# Altium PCB Sensor.PcbDoc
Units mil, origin at the board's own origin, x right, y up, seen from the top; angles counter-clockwise.
Board outline 6000 x 4000 mil, 2 copper layers (Top Layer, Bottom Layer); 24 components, 21 nets, 89 pads, 20 vias.
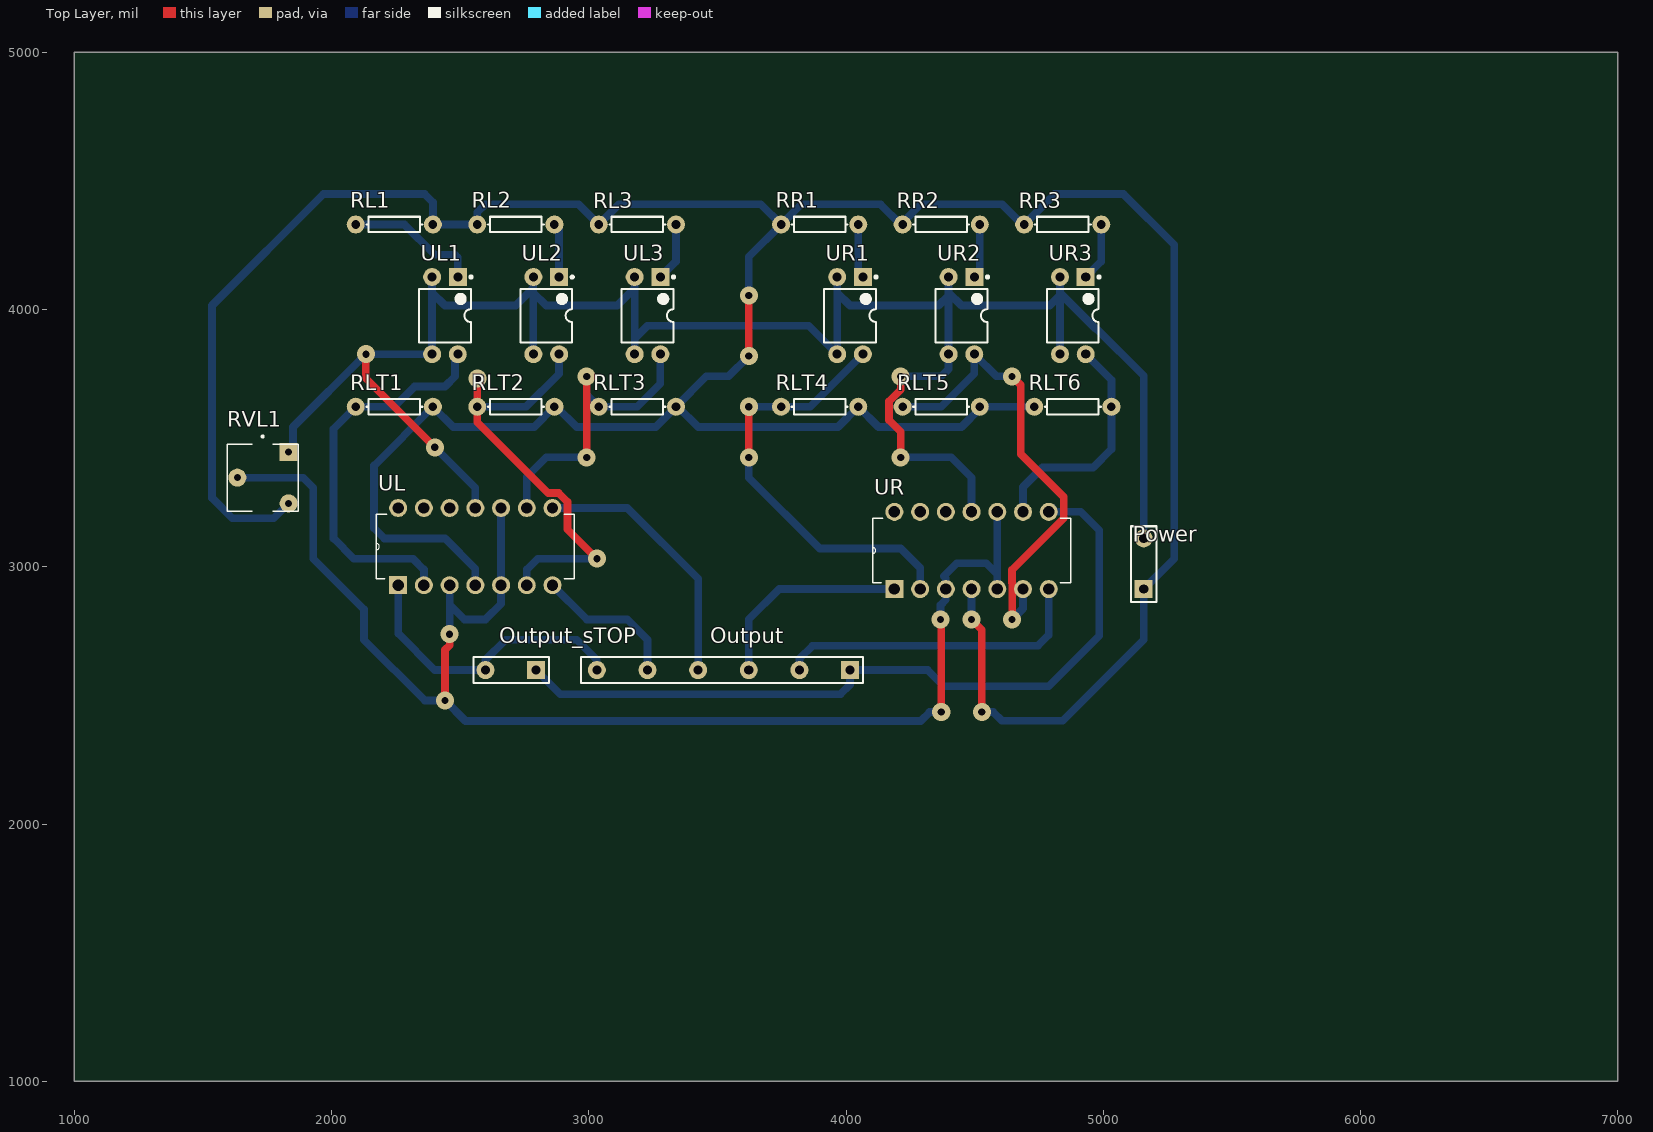
[diagram p0: Top Layer view]
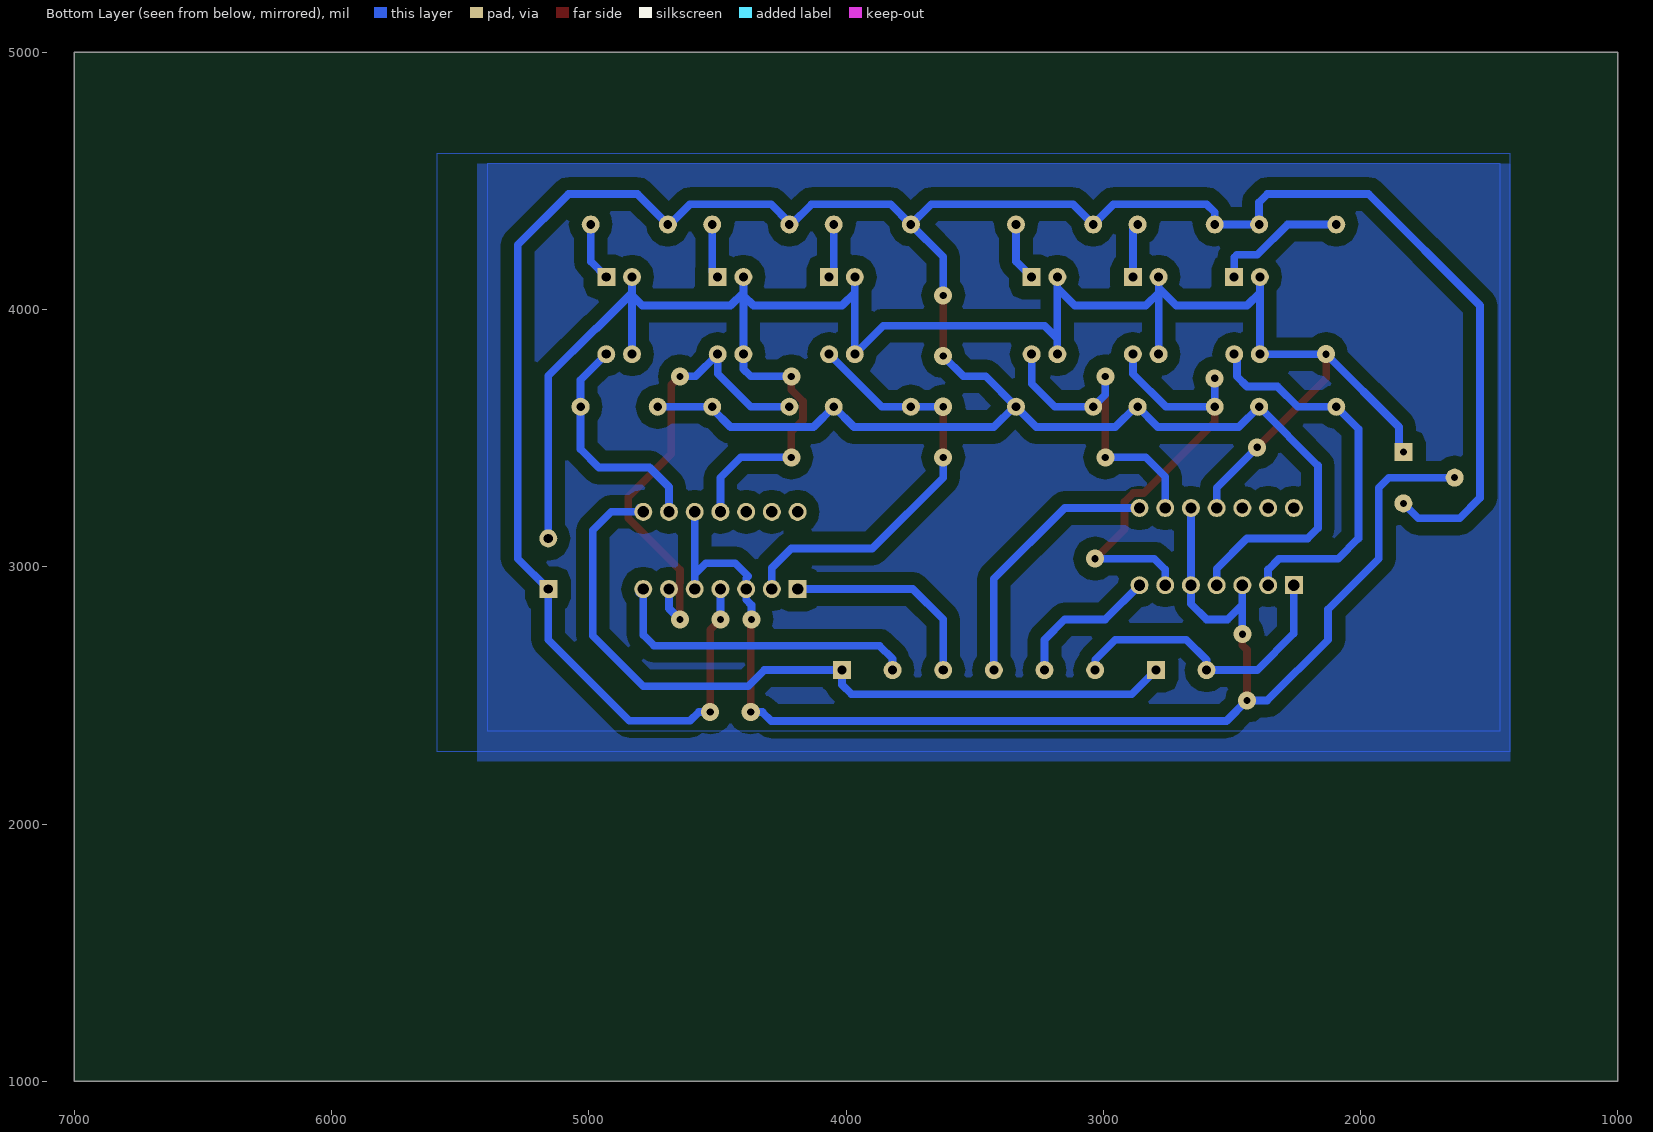
[diagram p1: Bottom Layer view, seen from below]

## Layer stack, top to bottom
Top Solder: solder mask 0.4, Solder Resist, Dk 3.5
Top Layer: signal copper 1.4
Dielectric 1: dielectric 12.6, FR-4, Dk 4.8
Bottom Layer: signal copper 1.4
Bottom Solder: solder mask 0.4, Solder Resist, Dk 3.5

## Board outline
1000,1000 7000,1000 7000,5000 1000,5000

## Design rules (kind name [scope] priority, off if disabled: settings)
Clearance [All] p1: gap=50 ignorepadtopadclearanceinfootprint=TRUE except(0: Arc-Hole Track-Hole SMDPad-Hole THPad-Hole Via-Hole Fill-Hole Poly-Hole Region-Hole Text-Hole)
PolygonConnect [All] p1: connectstyle=Relief reliefconductorwidth=10 reliefentries=4 polygonreliefangle="90 Angle" airgapwidth=10
RoomDefinition Sensor_Panel_6 [InComponentClass('Sensor_Panel_6')] p1: confinementstyle=ConfineIn formatcopy=TRUE lockcomponents=FALSE outline 7047.25,1102.36 7755.91,1102.36 7755.91,1496.06 7047.25,1496.06
RoomDefinition "AT long bus (13.3 x 4.2 inches)" [InComponentClass('AT long bus (13.3 x 4.2 inches)')] p2: confinementstyle=ConfineIn formatcopy=TRUE lockcomponents=FALSE outline 0,0 2000,0 2000,1000 0,1000
RoutingVias [All] p1: holewidth=28 width=50 viastyle="Through Hole" minholewidth=28 minwidth=50 maxholewidth=28 maxwidth=50
SolderMaskExpansion [All] p1: expansion=4
UnRoutedNet [All] p1: checkbadconnections=TRUE
Width [All] p1: maxlimit=30 minlimit=10 preferedwidth=30 minimp=50.000000 maximp=50.000000 favimp=50.000000
29 further rules are at their usual default settings.

## Classes and differential pairs
component class "AT long bus (13.3 x 4.2 inches)": P?

## Components (designator, comment, footprint, x,y, rotation, side; value= is the part's Value field where it differs from the comment)
Output "Header 6" HDR1X6 4015.75,2598.43 r180 top
Output_sTOP "Header 2" HDR1X2 2795.28,2598.43 r180 top
Power "Header 2" HDR1X2 5157.48,2913.39 r90 top
RL1 "Res1" AXIAL-0.3 2244.09,4330.71 r0 top value=1K
RL2 "Res1" AXIAL-0.3 2716.54,4330.71 r180 top value=1K
RL3 "Res1" AXIAL-0.3 3188.98,4330.71 r180 top value=1K
RLT1 "Res1" AXIAL-0.3 2244.09,3622.05 r180 top value=1K
RLT2 "Res1" AXIAL-0.3 2716.54,3622.05 r180 top value=1K
RLT3 "Res1" AXIAL-0.3 3188.98,3622.05 r180 top value=1K
RLT4 "Res1" AXIAL-0.3 3897.64,3622.05 r180 top value=1K
RLT5 "Res1" AXIAL-0.3 4370.08,3622.05 r180 top value=1K
RLT6 "Res1" AXIAL-0.3 4881.89,3622.05 r0 top value=1K
RR1 "Res1" AXIAL-0.3 3897.64,4330.71 r180 top value=1K
RR2 "Res1" AXIAL-0.3 4370.08,4330.71 r180 top value=1K
RR3 "Res1" AXIAL-0.3 4842.52,4330.71 r180 top value=1K
RVL1 "3362R-1-222" *TRIM_3362R-1-222 1732.28,3346.46 r270 top
UL "LM324N" *DIP254P762X508-14 2859.06,3228.35 r90 top
UL1 "Optoisolator1" DIP-4 2440.94,3976.38 r270 top
UL2 "Optoisolator1" DIP-4 2834.65,3976.38 r270 top
UL3 "Optoisolator1" DIP-4 3228.35,3976.38 r270 top
UR "LM324N" *DIP254P762X508-14 4788.19,3213.39 r90 top
UR1 "Optoisolator1" DIP-4 4015.75,3976.38 r270 top
UR2 "Optoisolator1" DIP-4 4448.82,3976.38 r270 top
UR3 "Optoisolator1" DIP-4 4881.89,3976.38 r270 top

## Footprints (in the part's own frame and the unit in brackets; to place one, negate y for a bottom-side part, rotate by r counter-clockwise, add the part's x,y. Pads: shape width x height; smd on the part's side, far side on the other; paste and mask are expansions set on the pad)
*DIP254P762X508-14 [mil]
  rect 70x70 hole 44: 1(-300,600)
  round 70 hole 44: 2(-300,500) 3(-300,400) 4(-300,300) 5(-300,200) 6(-300,100) 7(-300,0) 8(0,0) 9(0,100) 10(0,200) 11(0,300) 12(0,400) 13(0,500) 14(0,600)
  silkscreen extent -275,-85 -25,685
*TRIM_3362R-1-222 [mil]
  rect 70x70 hole 27.17: 1(-100,100.98)
  round 70 hole 27.17: 2(0,-98.43) 3(100,100.98)
  silkscreen extent -164,-138 130,138
AXIAL-0.3 [mil] "Axial Device, Thru-Hole; 2 Leads; 0.3 in Pin Spacing"
  round 70 hole 33.46: 1(-150,0) 2(150,0)
  silkscreen extent -109,-30 109,30
DIP-4 [mil] "DIP; 4 Leads; Row Spacing 7.62 mm; Pitch 2.54 mm"
  rect 70x70 hole 35.43: 1(-150,50)
  round 70 hole 35.43: 2(-150,-50) 3(150,-50) 4(150,50)
  silkscreen extent -155,-100 104,106, body extent -124,-98 124,98, height 220
HDR1X2 [mil] "Connector; Header; 2 Position"
  rect 70x70 hole 35.43: 1(0,0)
  round 70 hole 35.43: 2(196.85,0)
  silkscreen extent -50,-50 244,50
HDR1X6 [mil] "Connector; Header; 6 Position"
  rect 70x70 hole 35.43: 1(0,0)
  round 70 hole 35.43: 2(196.85,0) 3(393.7,0) 4(590.55,0) 5(787.4,0) 6(984.25,0)
  silkscreen extent -50,-50 1045,50

## Part data
Output: "Header, 6-Pin", LatestRevisionDate=17-Jul-2002, LatestRevisionNote="Re-released for DXP Platform.", Publisher="Altium Limited"
Output_sTOP Power: "Header, 2-Pin", LatestRevisionDate=17-Jul-2002, LatestRevisionNote="Re-released for DXP Platform.", Publisher="Altium Limited"
RL1 RL2 RL3 RLT1 RLT2 RLT3 RLT4 RLT5 RLT6 RR1 RR2 RR3: "Resistor", LatestRevisionDate=17-Jul-2002, LatestRevisionNote="Re-released for DXP Platform.", PackageDescription="Axial Device, Thru-Hole; 2 Leads; 0.3 in Pin Spacing", PackageReference=AXIAL-0.3, Published=8-Jun-2000, Publisher="Altium Limited"
RVL1: "Trimpot 2.2k Ohm 1/4 Sq Cer St", Package="2220 Bourns", Availability=Unavailable, MF=Bourns, MP=3362R-1-222, Price=None, SnapEDA_Link=https://www.snapeda.com/parts/3362R-1-222/Bourns/view-part/?ref=snap
UL UR: "OP Amp Quad GP ?15V/30V 14-Pin PDIP Tube", Package="DIP-14 STMicroelectronics", Availability=Unavailable, MF="ON Semiconductor", MP=LM324N, Price=None, SnapEDA_Link=https://www.snapeda.com/parts/LM324N/ON%20Semiconductor/view-part/?ref=snap
UL1 UL2 UL3 UR1 UR2 UR3: "4-Pin Phototransistor Optocoupler", DatasheetVersion=Nov-2003, LatestRevisionDate=04-Mar-2005, LatestRevisionNote="Sch pins 3 & 4 Swapped.", PackageReference=DIP-4, Published=24-Mar-1999, Publisher="Altium Limited"

## Via types
v1: diameter 70, hole 28, Top Layer to Bottom Layer, 20 vias

## Nets (pads, with @x,y where several pads share a name; then routed paths per layer and width w, separated by ;. In a path a pad name is that pad's centre, name@x,y a point inside that pad or via, vN(x,y) a via of type N, cw(c..) or ccw(c..) an arc to the next point about the centre after c; other vN are vias at no path point)
NetOutput_1: Output.1 Output_sTOP.1 UR.8 | length 3065.4
  Bottom Layer w30: Output_sTOP.1 2889.8,2503.9 3978.31,2503.9 4015.75,2541.34 Output.1 4317.34,2598.43 4380.49,2535.28 4788.23,2535.28 4984.25,2731.3 4984.25,3141.73 4912.6,3213.39 UR.8 UR.8@4803.15,3228.35
NetOutput_2: Output.2 UR.7 | length 1250.7
  Bottom Layer w30: Output.2 3818.9,2641.81 3870.04,2692.95 4746.02,2692.95 4788.19,2735.12 UR.7 UR.7@4803.15,2898.43
NetOutput_3: Output.3 UR.1 | length 811.9
  Bottom Layer w30: Output.3 3622.05,2795.28 3740.16,2913.39 UR.1
NetOutput_4: Output.4 UL.8 | length 1034.6
  Bottom Layer w30: UL.8 3149.61,3228.35 3425.2,2952.76 Output.4
NetOutput_5: Output.5 UL.7 | length 596.3
  Bottom Layer w30: UL.7@2874.02,2913.39 UL.7 2992.13,2795.28 3149.61,2795.28 3228.35,2716.54 Output.5
NetOutput_6: Output.6 Output_sTOP.2 UL.1 | length 1162.8
  Bottom Layer w30: UL.1 2259.06,2740.94 2401.57,2598.43 Output_sTOP.2 2598.43,2637.8 2677.17,2716.54 2952.76,2716.54 3031.5,2637.8 Output.6
NetPower_1: Power.1 RL1.2 RL2.2 RL3.2 RLT1.1 RLT2.1 RLT3.1 RLT4.1 RLT5.1 RLT6.1 RR1.2 RR2.2 RR3.2 RVL1.3 UL.4 UR.4 | length 13019
  Top Layer w30: v1(3622.05,3818.9) v1(3622.05,4055.12) ; v1(4488.19,2795.28) 4527.78,2755.68 v1(4527.78,2435.16)
  Bottom Layer w30: RVL1.3 1775.79,3188.98 1614.17,3188.98 1535.43,3267.72 1535.43,4015.75 1968.5,4448.82 2362.2,4448.82 2394.09,4416.93 RL1.2 RL2.2 2566.54,4377.56 2598.43,4409.45 2960.24,4409.45 RL3.2 3117.72,4409.45 3668.9,4409.45 RR1.2 ; UL.4 2559.06,2992.13 2440.94,3110.24 2204.72,3110.24 2165.35,3149.61 2165.35,3393.31 RLT1.1 2472.83,3543.31 2787.8,3543.31 RLT2.1 2874.01,3622.05 2952.76,3543.31 3260.24,3543.31 RLT3.1 ; v1(3622.05,3818.9) 3543.31,3740.16 3457.09,3740.16 RLT3.1 ; v1(3622.05,4055.12) 3622.05,4205.12 RR1.2 ; v1(4488.19,2795.28) UR.4 ; v1(4527.78,2435.16) 4572.72,2435.16 4606.3,2401.57 4842.52,2401.57 5157.48,2716.54 Power.1 5275.59,3031.5 5275.59,4251.97 5078.74,4448.82 4810.63,4448.82 RR3.2 4685.04,4330.71 4606.3,4409.45 4291.34,4409.45 4220.08,4338.19 RR2.2 4212.6,4330.71 4133.86,4409.45 3826.38,4409.45 RR1.2 ; RLT6.1 RLT5.1 4520.08,3614.57 4448.82,3543.31 4126.38,3543.31 RLT4.1 3968.9,3543.31 3425.2,3543.31 3346.46,3622.05 RLT3.1
NetPower_2: Power.2 RVL1.1 UL1.2 UL1.3 UL2.2 UL2.3 UL3.2 UL3.3 UL.11 UR1.2 UR1.3 UR2.2 UR2.3 UR3.2 UR3.3 UR.11 | length 8155.7
  Top Layer w30: v1(2133.46,3826.38) 2133.46,3732.68 v1(2401.57,3464.57) ; v1(4212.6,3425.2) 4212.6,3524.41 4167.52,3569.49 4167.52,3643.82 4212.6,3688.9 v1(4212.6,3740.16)
  Bottom Layer w30: RVL1.1 1850.39,3463.58 1850.39,3543.31 v1(2133.46,3826.38) UL1.3 2390.94,4065.75 ; UL1.2 2390.94,4065.75 ; v1(2401.57,3464.57) 2559.06,3307.09 UL.11 ; UL2.3 2784.65,4065.75 ; UL2.2 2784.65,4083.86 ; UL3.3 3178.35,3887.01 ; UL3.2 3178.35,4083.86 ; UR1.2 3965.75,4065.75 ; v1(4212.6,3425.2) 4409.45,3425.2 4488.19,3346.46 UR.11 ; v1(4212.6,3740.16) 4370.08,3740.16 4398.82,3768.9 4398.82,4055.12 ; UR2.2 4398.82,4065.75 ; UR3.3 4831.89,4055.12 ; UR3.2 4831.89,4064.45 ; Power.2 5157.48,3742.21 4973.31,3926.38 4969.97,3926.38 4831.89,4064.45 ; 2390.94,4065.75 2440.94,4015.75 2716.54,4015.75 2784.65,4083.86 ; 2784.65,4065.75 2834.65,4015.75 3110.24,4015.75 3178.35,4083.86 ; 2784.65,4065.75 2784.65,4083.86 ; 3178.35,3887.01 3228.35,3937.01 3855.12,3937.01 UR1.3 3965.75,4065.75 ; 3178.35,3887.01 3178.35,4083.86 ; 3965.75,4065.75 4015.75,4015.75 4359.45,4015.75 4398.82,4055.12 ; 4398.82,4055.12 4398.82,4065.75 ; 4398.82,4065.75 4448.82,4015.75 4792.52,4015.75 4831.89,4055.12 ; 4831.89,4055.12 4831.89,4064.45
NetRL1_1: RL1.1 UL1.1 | length 525.8
  Bottom Layer w30: RL1.1 2283.46,4330.71 2401.57,4212.6 2480.32,4212.6 2490.94,4201.97 UL1.1
NetRL2_1: RL2.1 UL2.1 | length 211.8
  Bottom Layer w30: RL2.1 2884.65,4312.6 UL2.1
NetRL3_1: RL3.1 UL3.1 | length 229.4
  Bottom Layer w30: UL3.1 3338.98,4187.01 RL3.1
NetRLT1_2: RLT1.2 UL1.4 UL.2 | length 1535.3
  Bottom Layer w30: UL.2 2359.06,2988.98 2316.54,3031.5 2086.61,3031.5 2007.87,3110.24 2007.87,3535.83 RLT1.2 2244.1,3622.05 2322.83,3700.79 2440.94,3700.79 2480.32,3740.16 2480.32,3815.75 UL1.4
NetRLT2_2: RLT2.2 UL2.4 UL.6 | length 1826.1
  Top Layer w30: v1(2566.54,3732.68) 2566.54,3561.86 2842.05,3286.35 2883.08,3286.35 2917.06,3252.37 2917.06,3145.94 v1(3031.5,3031.5)
  Bottom Layer w30: v1(2566.54,3732.68) RLT2.2 2755.91,3622.05 2884.65,3750.79 UL2.4 ; UL.6 2759.06,2988.98 2801.58,3031.5 v1(3031.5,3031.5)
NetRLT3_2: RLT3.2 UL3.4 UL.9 | length 1229.5
  Top Layer w30: v1(2992.13,3425.2) v1(2992.13,3740.16)
  Bottom Layer w30: UL.9 2759.06,3349.61 2834.65,3425.2 v1(2992.13,3425.2) ; v1(2992.13,3740.16) 2992.13,3668.9 RLT3.2 3188.98,3622.05 3278.35,3711.42 UL3.4
NetRLT4_2: RLT4.2 UR1.4 UR.2 | length 1697.4
  Top Layer w30: v1(3622.05,3425.2) v1(3622.05,3622.05)
  Bottom Layer w30: v1(3622.05,3425.2) 3622.05,3346.46 3897.64,3070.87 4212.6,3070.87 4288.19,2995.27 UR.2 ; v1(3622.05,3622.05) 3861.42,3622.05 UR1.4
NetRLT5_2: RLT5.2 UR2.4 UR.6 | length 1837.4
  Top Layer w30: v1(4645.67,2795.28) 4646.19,2795.8 4646.19,2937.41 4645.67,2937.93 4645.67,2988.84 4846.19,3189.36 4846.19,3271.39 4679.33,3438.25 4679.33,3706.5 v1(4645.67,3740.16)
  Bottom Layer w30: RLT5.2 4370.08,3622.05 4498.82,3750.79 UR2.4 4585.04,3740.16 v1(4645.67,3740.16) ; v1(4645.67,2795.28) 4688.19,2837.8 UR.6
NetRLT6_2: RLT6.2 UR3.4 UR.9 | length 912.1
  Bottom Layer w30: UR.9 4688.19,3310.24 4763.78,3385.83 4960.63,3385.83 5031.89,3457.09 5031.89,3726.38 UR3.4
NetRR1_1: RR1.1 UR1.1 | length 211.8
  Bottom Layer w30: RR1.1 4047.64,4144.49 UR1.1
NetRR2_1: RR2.1 UR2.1 | length 213.1
  Bottom Layer w30: UR2.1 4520.08,4147.64 RR2.1
NetRR3_1: RR3.1 UR3.1 | length 229.4
  Bottom Layer w30: UR3.1 4992.52,4187.01 RR3.1
NetRVL1_2: RVL1.2 UL.3 UL.5 UL.10 UR.3 UR.5 UR.10 | length 5537.7
  Top Layer w30: v1(2440.95,2480.32) 2440.95,2677.16 2459.06,2695.28 v1(2459.06,2737.79) ; v1(4367.34,2795.41) 4370.29,2792.46 v1(4370.29,2435.16)
  Bottom Layer w30: RVL1.2 1889.76,3346.46 1929.13,3307.09 1929.13,3031.5 2125.98,2834.65 2125.98,2716.54 2362.2,2480.32 v1(2440.95,2480.32) 2520.95,2400.32 4290.08,2400.32 4324.92,2435.16 v1(4370.29,2435.16) ; v1(2459.06,2737.79) 2459.06,2852.76 ; UL.3 2459.06,2852.76 ; UL.10 2659.06,2855.91 2598.43,2795.28 2516.54,2795.28 2459.06,2852.76 ; v1(4367.34,2795.41) 4367.34,2851.11 4388.19,2871.96 UR.3 4388.19,2954.81 4380.16,2962.84 4430.71,3013.39 4545.67,3013.39 4588.19,2970.87 ; UR.5 4588.19,2970.87 ; UR.10 4588.19,2970.87
pads on no net: UL.12 UL.13 UL.14 UR.12 UR.13 UR.14

## Polygon pours and split planes (outlines as drawn)
no net on Bottom Layer "Bottom Layer-No Net 1" (solid, pour order 18): 1417.32,4566.93 5433.07,4566.93 5433.07,2244.09 1417.32,2244.09
no net on Bottom Layer "Bottom Layer-No Net 1" (solid, shelved, pour order 12): 1417.32,4606.3 5590.55,4606.3 5590.55,2283.46 1417.32,2283.46
no net on Bottom Layer "Bottom Layer-No Net" (solid, shelved, pour order 4): 0,0
no net on Bottom Layer "Bottom Layer-No Net 1" (solid, shelved, pour order 6): 0,0
no net on Bottom Layer "Bottom Layer-No Net 1" (solid, shelved, pour order 16): 1456.69,4566.93 5393.7,4566.93 5393.7,2362.2 5314.96,2362.2 1456.69,2362.2